# Altium PCB SA01-UARTC-REV-A01.PcbDoc
Units mm, origin at the board's own origin, x right, y up, seen from the top; angles counter-clockwise.
Board outline 70 x 22 mm, 4 copper layers (Top Copper, Signal Layer 1, Signal Layer 2, Bottom Copper), stack 1.57 mm thick; 38 components, 35 nets, 182 pads, 169 vias.
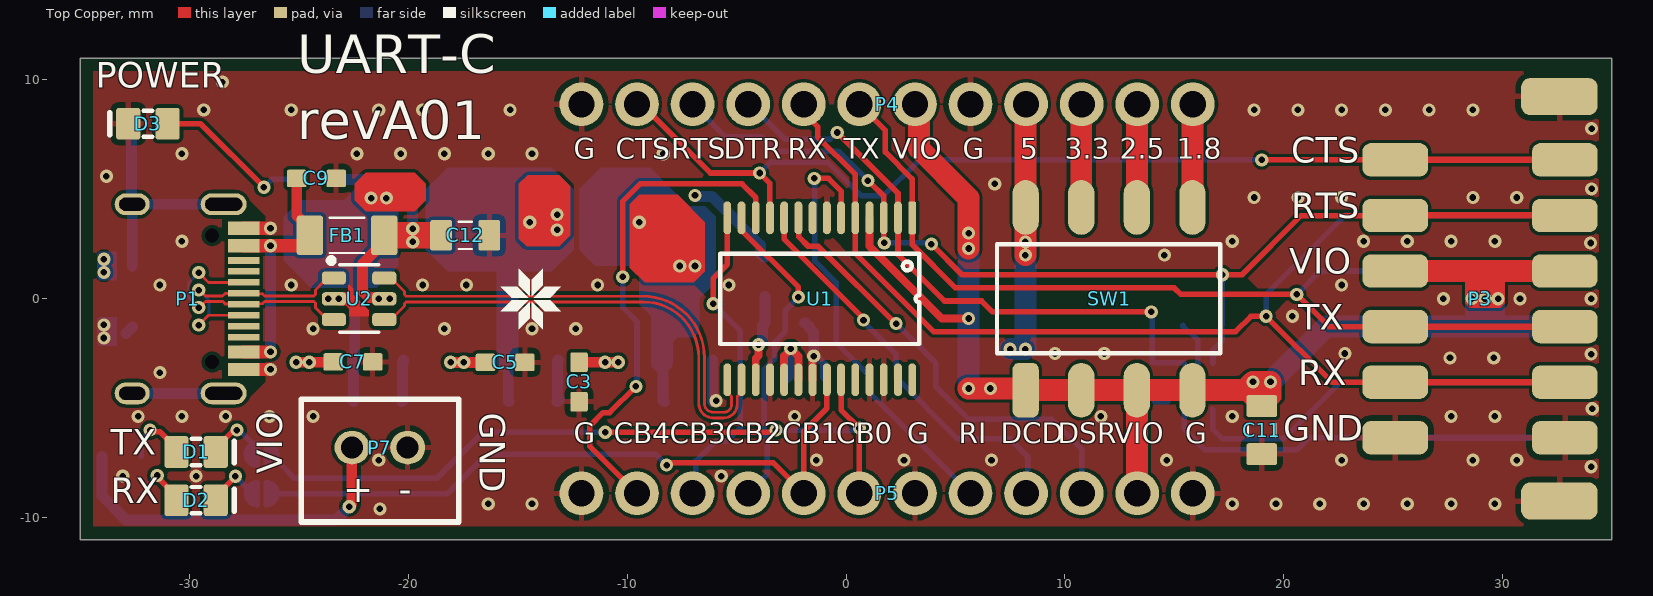
[diagram p0: Top Copper view]
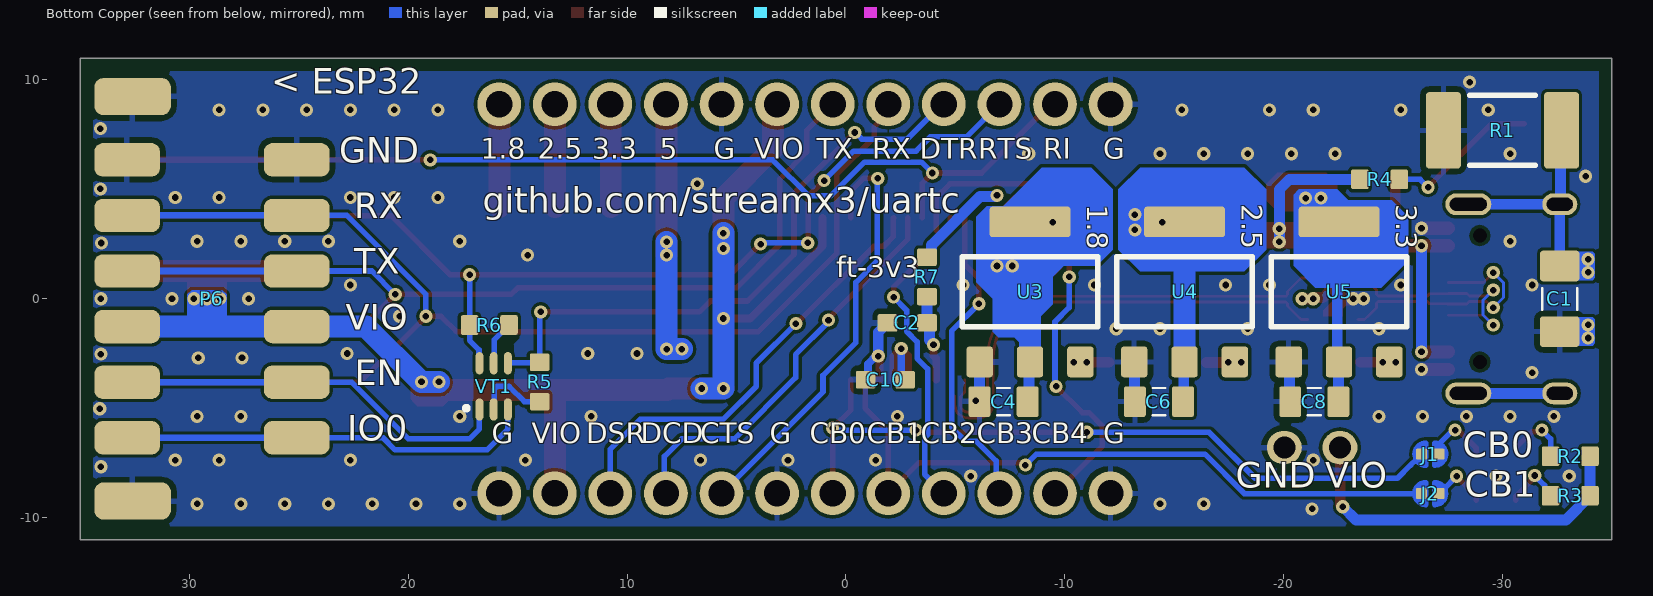
[diagram p1: Bottom Copper view, seen from below]
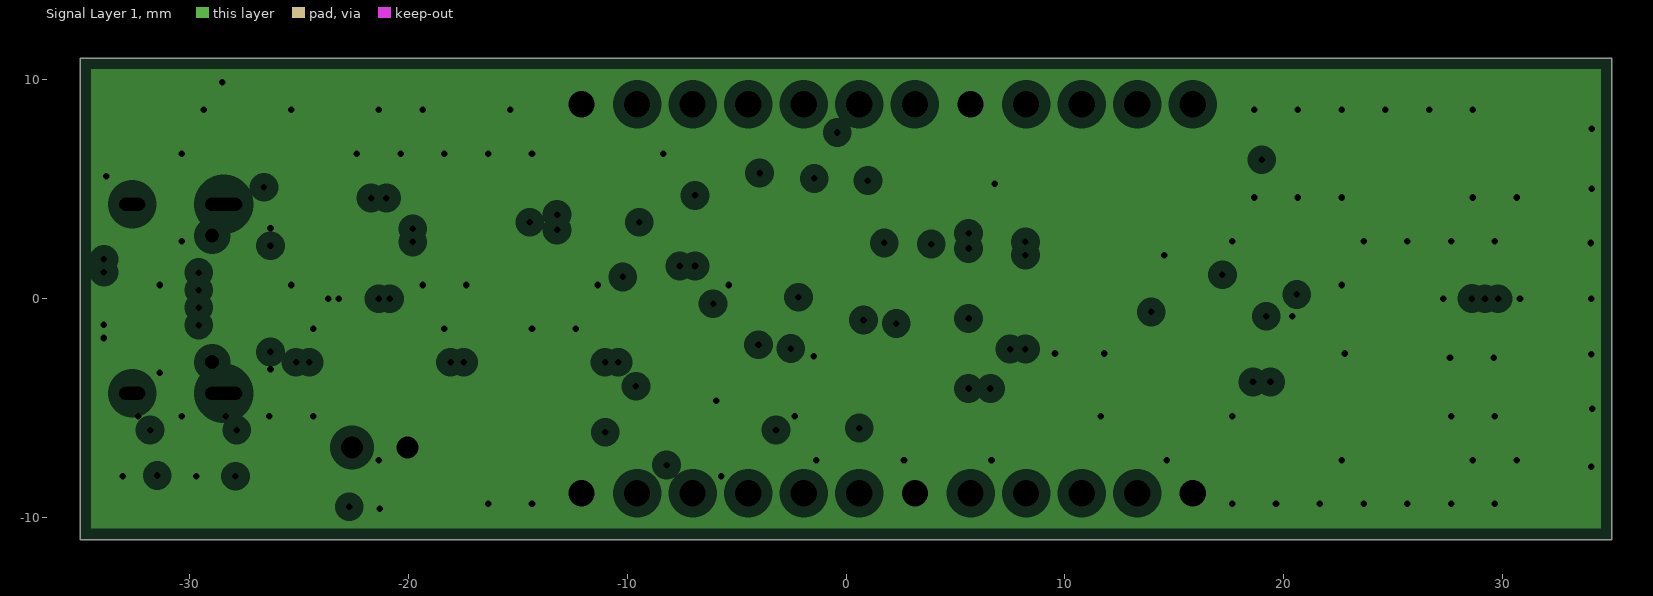
[diagram p2: Signal Layer 1, clearances drawn from the general rule]
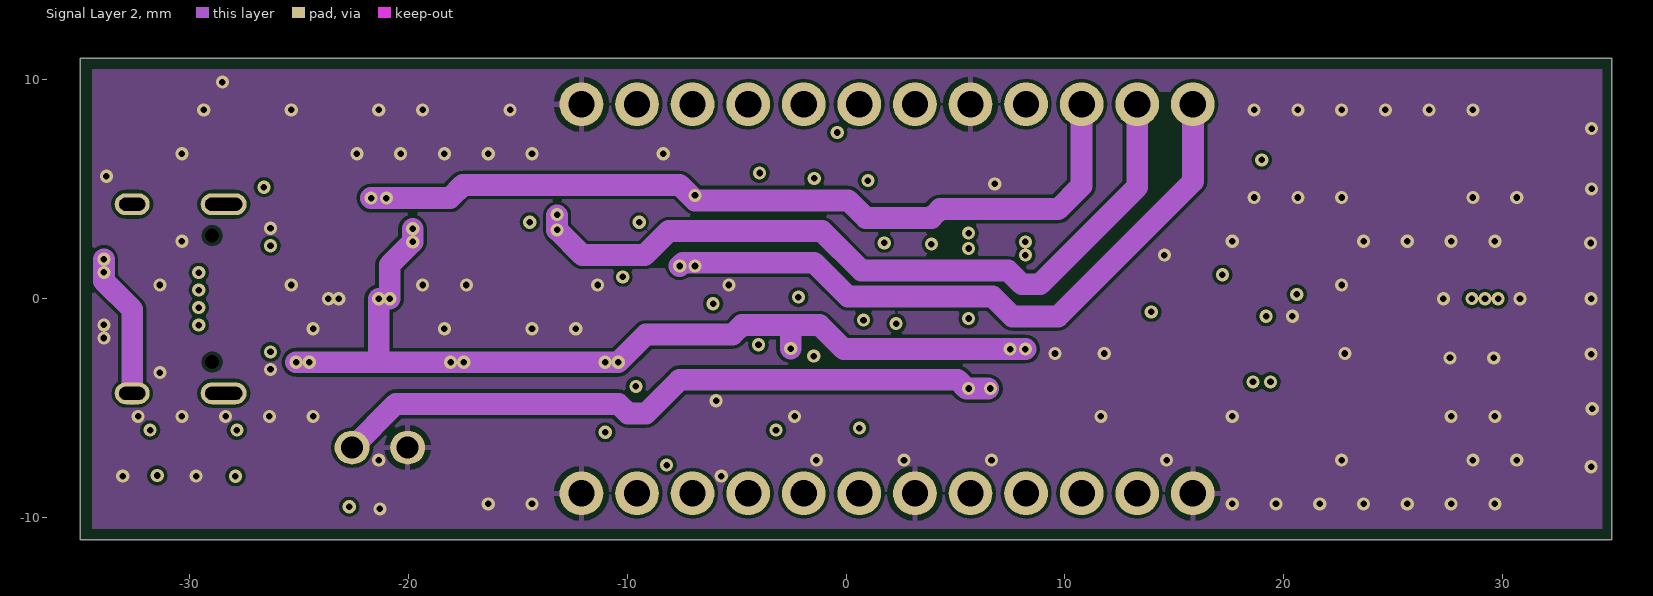
[diagram p3: Signal Layer 2]
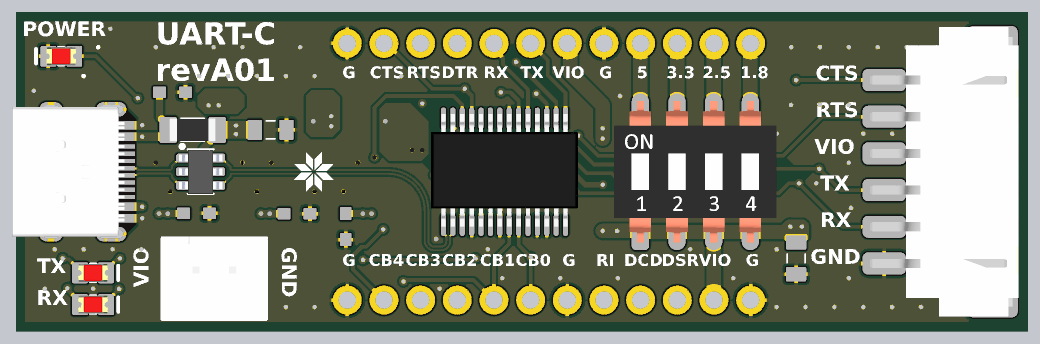
[diagram p4: 3D render of the assembled board from above, using the file's embedded part models]
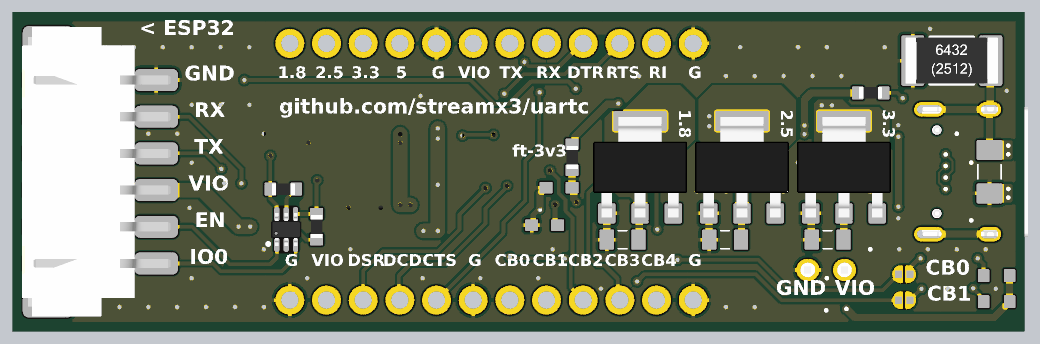
[diagram p5: 3D render of the assembled board from below, using the file's embedded part models]

## Layer stack, top to bottom
Top Mask: solder mask 0.015, Solder Resist, Dk 3.8
Top Copper: signal copper 0.035
Dielectric 1: prepreg 0.1, 2313, Dk 4.05
Signal Layer 1: plane copper 0.0175, net GND
Core: core 1.265, FR-4, Dk 4.5
Signal Layer 2: signal copper 0.0175
Dielectric 2: prepreg 0.1, 2313, Dk 4.05
Bottom Copper: signal copper 0.035
Bottom Mask: solder mask 0.015, Solder Resist, Dk 3.8

## Board outline
-35,-11 35,-11 35,11 -35,11

## Design rules (kind name [scope] priority, off if disabled: settings)
Clearance [All] p1: gap=0.15 ignorepadtopadclearanceinfootprint=FALSE except(0: Arc-Hole Track-Hole SMDPad-Hole THPad-Hole Via-Hole Fill-Hole Poly-Hole Region-Hole Text-Hole; 0.1: Arc-Arc Arc-Track Arc-SMDPad Arc-THPad Arc-Via Arc-Text Track-Track Track-SMDPad Track-THPad Track-Via Track-Text SMDPad-SMDPad SMDPad-THPad SMDPad-Via SMDPad-Text THPad-THPad THPad-Via THPad-Text Via-Via Via-Text Text-Text)
DiffPairsRouting [All] p1: maxlimit=0.254 minlimit=0.1 mostfreqgap=0.254 toplayer_prefgap=0.127 toplayer_minwidth=0.1 toplayer_maxwidth=0.381 toplayer_prefwidth=0.13 midlayer1_mingap=0.254 midlayer1_minwidth=0.381 midlayer1_maxwidth=0.381 midlayer1_prefwidth=0.381 bottomlayer_prefgap=0.127 bottomlayer_minwidth=0.1 bottomlayer_maxwidth=0.381 bottomlayer_prefwidth=0.13 maxuncoupledlength=12.7
PlaneClearance [All] p1: clearance=0.508
PlaneConnect [All] p1: planeconnectstyle=Direct reliefexpansion=0.508 reliefentries=4 reliefconductorwidth=0.254 reliefairgap=0.2
PolygonConnect [All] p1: thpad.connectstyle=Relief thpad.reliefconductorwidth=0.254 thpad.reliefentries=4 thpad.polygonreliefangle="90 Angle" thpad.airgapwidth=0.254 smdpad.connectstyle=Relief smdpad.reliefconductorwidth=0.254 smdpad.reliefentries=4 smdpad.polygonreliefangle="90 Angle" smdpad.airgapwidth=0.254 via.connectstyle=Direct via.reliefconductorwidth=0.254 via.reliefentries=4 via.polygonreliefangle="90 Angle" via.airgapwidth=0.254
RoutingVias [All] p1: holewidth=0.3 width=0.6 viastyle="Through Hole" minholewidth=0.2 minwidth=0.4 maxholewidth=0.711 maxwidth=1.27
SolderMaskExpansion [All] p1: expansion=0.102 istentingtop=FALSE
Width Width_POWER [InNetClass('POWER_NET_CLASS')] p1: maxlimit=5 minlimit=0.1 preferedwidth=0.5 minimp=50.000000 maximp=50.000000 favimp=50.000000
Width [All] p2: maxlimit=5 minlimit=0.1 preferedwidth=0.254 minimp=50.000000 maximp=50.000000 favimp=50.000000
27 further rules are at their usual default settings.

## Classes and differential pairs
differential pair class USB1: USB USBa
net class USB: USB_N USB_P USBa_N USBa_P
net class POWER_NET_CLASS: 1V8 2V5 3V3 3V3FT GND TYPEC_SHIELD VBUS VBUSpre VIO
differential pair USB: +USB_P -USB_N
differential pair USBa: +USBa_P -USBa_N

## Components (designator, comment, footprint, x,y, rotation, side; value= is the part's Value field where it differs from the comment)
C1 "1nF" C1206 -32.613,0 r90 bottom
C2 "100nF" C0603_NOSILK -2.8,-1.1 r180 bottom
C3 "100nF" C0603_NOSILK -12.2,-3.8 r90 top
C4 "10uF" C0805 -7.2,-4.7 r0 bottom
C5 "100nF" C0603_NOSILK -15.575,-2.905 r180 top
C6 "10uF" C0805 -14.3,-4.7 r0 bottom
C7 "100nF" C0603_NOSILK -22.53,-2.886 r180 top
C8 "10uF" C0805 -21.4,-4.7 r0 bottom
C9 "1nF" C0603_NOSILK -24.2,5.5 r0 top
C10 "100nF" C0603_NOSILK -1.8,-3.7 r180 bottom
C11 "4.7uF" C0805 19,-6 r90 top
C12 "4.7uF" C0805 -17.4,2.9 r180 top
D1 "LED" LED_0805 -29.7,-7 r180 top
D2 "LED" LED_0805 -29.7,-9.2 r180 top
D3 "LED" LED_0805 -31.9,8 r0 top
FB1 "FB_BLM31PG500SN1L" FER1206 -22.8,2.9 r0 top
J1 "CFG2_CUT" CFG_J_d1_CUT -26.7,-7.1 r0 bottom
J2 "CFG2_CUT" CFG_J_d1_CUT -26.7,-8.9 r0 bottom
P1 "CON-USB-TYPE-C-B-229" USB-Type-C-B-229 -30.07,0 r270 top
P3 "XHB 2.54-6P SMD" XHB-2.54-6P 29.1,0 r90 top
P4 "HEADER 1x12" "HEADER 1x12 2.54 NO PINS" 1.88,8.89 r90 top
P5 "HEADER 1x12" "HEADER 1x12 2.54 NO PINS" 1.88,-8.89 r90 top
P6 "XHB 2.54-6P SMD" XHB-2.54-6P 29.1,0 r270 bottom
P7 "XH 2.54-2P SMT" XH2.54-2P -21.3,-6.8 r0 top
R1 "=Value" R2512 -30,7.7 r180 bottom
R2 "=Value" R0603_NOSILK -33.1,-7.2 r0 bottom
R3 "=Value" R0603_NOSILK -33.1,-9 r0 bottom
R4 "=Value" R0603_NOSILK -24.384,5.461 r180 bottom
R5 "=Value" R0603_NOSILK 14,-3.8 r270 bottom
R6 "=Value" R0603_NOSILK 16.3,-1.2 r180 bottom
R7 "=Value" R0603_NOSILK -3.7,1 r90 bottom
SW1 "KLS7-KL-04-N-0-0" KLS7-KL-04-N-0-0 12.02,0 r0 top
U1 "FT232RL" SSOP28_0.65_7.8 -1.2,0 r180 top
U2 "USBLC6-2" SOT-23-6L -22.25,0 r270 top
U3 "LD1117S18TR" SOT-223 -8.41,0.314 r180 bottom
U4 "LD1117S25TR" SOT-223 -15.47,0.314 r180 bottom
U5 "LD1117S33TR" SOT-223 -22.53,0.314 r180 bottom
VT1 "BC847BDW1T1G" SOT363/SOT65P210X110-6N 16.1,-4 r90 bottom

## Footprints (in the part's own frame and the unit in brackets; to place one, negate y for a bottom-side part, rotate by r counter-clockwise, add the part's x,y. Pads: shape width x height; smd on the part's side, far side on the other; paste and mask are expansions set on the pad)
C0603_NOSILK [mm]
  rrect20% 0.9x0.8 smd: 1(-0.9,0) 2(0.9,0)
  body extent -0.8,-0.4 0.8,0.39, height 0.85
C0805 [mm]
  rrect20% 1x1.4 smd: 1(-1.1,0) 2(1.1,0)
  silkscreen extent -0.3,-0.63 0.3,0.63, body extent -1,-0.63 1,0.63, height 0.85
C1206 [mm]
  rrect20% 1.4x1.8 smd: 1(-1.5,0) 2(1.5,0)
  silkscreen extent -0.5,-0.8 0.5,0.8, body extent -1.6,-0.8 1.6,0.8, height 1.3
CFG_J_d1_CUT [mm]
  rrect20% 0.5x0.5 smd: 1(-0.4,0) 2(0.4,0)
  Top Copper region: 0.2,0.5 0.4,0.5 0.7,0.2 0.7,-0.2 0.7,-0.2 0.4,-0.5 0.2,-0.5
  Top Copper region: -0.2,-0.5 -0.4,-0.5 -0.7,-0.2 -0.7,0.2 -0.7,0.2 -0.4,0.5 -0.2,0.5
  Top Copper lines w0.254: -0.4,-0.458 ccw(c-0.2,0) -0.2,-0.5 -0.2,0 -0.2,0.5 ccw(c-0.2,0) -0.4,-0.458 ; 0.2,0.5 cw(c0.2,0) 0.639,0.239 cw(c0.2,0) 0.2,-0.5 0.2,0 0.2,0.5
FER1206 [mm]
  rrect20% 1.2x1.8 smd: 1(-1.7,0) 2(1.7,0)
  silkscreen extent -0.8,-0.8 0.8,0.8, body extent -1.6,-0.8 1.6,0.8, height 1.1
"HEADER 1x12 2.54 NO PINS" [mm]
  round 2 hole 1.2: 1(0,13.97) 2(0,11.43) 3(0,8.89) 4(0,6.35) 5(0,3.81) 6(0,1.27) 7(0,-1.27) 8(0,-3.81) 9(0,-6.35) 10(0,-8.89) 11(0,-11.43) 12(0,-13.97)
KLS7-KL-04-N-0-0 [mm]
  rrect50% 1.2x2.5 smd: 1(-3.81,-4.175)
  oval 1.2x2.5 smd: 2(-1.27,-4.175) 3(1.27,-4.175) 4(3.81,-4.175) 5(3.81,4.175) 6(1.27,4.175) 7(-1.27,4.175) 8(-3.81,4.175)
  silkscreen extent -5.12,-2.49 5.08,2.49, body extent -5.63,-4.9 5.63,4.9, height 4
LED_0805 [mm]
  rrect20% 1.1x1.45 smd: A(0.9,0) C(-0.9,0)
  silkscreen extent -1.75,-0.6 0.2,0.6, body extent -1.01,-0.63 1.01,0.62, height 1.1
R0603_NOSILK [mm]
  rrect20% 0.8x0.9 smd: 1(-0.9,0) 2(0.9,0)
  body extent -0.8,-0.4 0.8,0.4
R2512 [mm]
  rrect20% 1.6x3.5 smd: 1(-2.7,0) 2(2.7,0)
  silkscreen extent -1.5,-1.6 1.5,1.6, body extent -3.2,-1.6 3.2,1.6, height 0.6
SOT363/SOT65P210X110-6N [mm]
  rrect100% 1.02x0.36 smd: 1(-1.055,0.65) 2(-1.055,0) 3(-1.055,-0.65) 4(1.055,-0.65) 5(1.055,0) 6(1.055,0.65)
  silkscreen extent -1.1,1.15 -0.9,1.35, body extent -1.15,-1.05 1.15,1.05, height 1
SOT-23-6L [mm]
  rrect50% 0.6x1.1 smd mask+0.095: 1(-0.95,-1.15) 2(0,-1.15) 3(0.95,-1.15) 4(0.95,1.15) 5(0,1.15) 6(-0.95,1.15)
  silkscreen extent -1.85,-1.37 1.53,0.89, body extent -1.52,-1.5 1.53,1.5, height 1.4
SOT-223 [mm]
  rrect20% 1.2x1.4 smd: 1(-2.3,-3.2) 2(0,-3.2) 3(2.3,-3.2)
  rrect20% 3.7x1.4 smd: TAB(0,3.2)
  silkscreen extent -3.1,-1.6 3.1,1.6, body extent -3.25,-3.48 3.25,3.48, height 1.7
SSOP28_0.65_7.8 [mm]
  rrect50% 0.36x1.5 smd: 1(-4.225,-3.7)
  oval 0.36x1.5 smd: 2(-3.575,-3.7) 3(-2.925,-3.7) 4(-2.275,-3.7) 5(-1.625,-3.7) 6(-0.975,-3.7) 7(-0.325,-3.7) 8(0.325,-3.7) 9(0.975,-3.7) 10(1.625,-3.7) 11(2.275,-3.7) 12(2.925,-3.7) 13(3.575,-3.7) 14(4.225,-3.7) 15(4.225,3.7) 16(3.575,3.7) 17(2.925,3.7) 18(2.275,3.7) 19(1.625,3.7) 20(0.975,3.7) 21(0.325,3.7) 22(-0.325,3.7) 23(-0.975,3.7) 24(-1.625,3.7) 25(-2.275,3.7) 26(-2.925,3.7) 27(-3.575,3.7) 28(-4.225,3.7)
  silkscreen extent -4.55,-2.06 4.55,2.06, body extent -5.1,-4 5.1,3.8, height 1.85
USB-Type-C-B-229 [mm]
  rect 0.6x1.45 smd: A1-B12(-3.225,2.548) A4-B9(-2.425,2.548) A9-B4(2.425,2.548) A12-B1(3.225,2.548)
  rect 0.3x1.45 smd: A5(-1.25,2.548) A6(-0.25,2.548) A7(0.25,2.548) A8(1.25,2.548) B5(1.75,2.548) B6(0.75,2.548) B7(-0.75,2.548) B8(-1.75,2.548)
  round 0.2 hole 0.65 unplated paste+0 mask+0.3: MECH(-2.89,1.102) MECH(2.89,1.102)
  oval 1x2.1 hole 0.6 slot 1.7 at 90 deg: SHIELD(-4.32,1.632) SHIELD(4.32,1.632)
  oval 1x1.6 hole 0.6 slot 1.2 at 90 deg: SHIELD(-4.32,-2.548) SHIELD(4.32,-2.548)
  body extent -4.48,-5.2 4.48,2.55, height 3.26
XH2.54-2P [mm]
  oval 1.6x1.524 hole 1: 1(-1.27,0) 2(1.27,0)
  silkscreen extent -3.6,-3.4 3.6,2.2, body extent -3.7,-3.5 3.7,2.3, height 7.1
XHB-2.54-6P [mm]
  rrect50% 1.524x3 smd: 1(-6.35,-3.75) 1(-6.35,4) 2(-3.81,-3.75) 2(-3.81,4) 3(-1.27,4) 3(-1.27,-3.75) 4(1.27,4) 4(1.27,-3.75) 5(3.81,-3.75) 5(3.81,4) 6(6.35,-3.75) 6(6.35,4)
  rrect50% 1.7x3.5 smd: S1(-9.24,-3.5) S2(9.24,-3.5)
  body extent -10.02,-5.3 10.02,5, height 6

## Part data
C1: library part C1206_1nF_2KV, "Ceramic capacitor", Voltage=2KV, Capacity=1nF, PriceRCSUAH=1,7, RCS=https://www.rcscomponents.kiev.ua/product/1nf-2000v-x7r-10-1206-3k-reel-1206b102k202n3-hitano-kondensatory-keramicheskie-smd_11455.html, Size=1206
C2 C3 C5 C7 C10: library part C0603_100nF_16V, "Ceramic capacitor", LCSC=C108079, Voltage=16V, Capacity=100nF, ComponentLink1Description=URLLCSC, ComponentLink1URL=https://lcsc.com/product-detail/Multilayer-Ceramic-Capacitors-MLCC-SMD-SMT_YAGEO-CC0603KRX7R7BB104_C108079.html, Kosmodrom=http://www.kosmodrom.com.ua/el.php?name=CP06030.125V8020, MF=YAGEO, MP=CC0603KRX7R7BB104, PriceKosmodromUAH=1, PriceLCSC=0.0049, Size=0603
C4 C6 C8: library part C0805_10uF_10V, "Ceramic capacitor", Voltage=10V, Capacity=10uF, Size=0805
C9: library part C0603_1nF_25V, "Ceramic capacitor", Voltage=25V, Capacity=1nF, Kosmodrom=http://www.kosmodrom.com.ua/el.php?name=CP0603100050V10, PriceKosmodromUAH=0,75, Size=0603
C11 C12: library part C0805_4.7uF_10V, "Ceramic capacitor", Voltage=10V, Capacity=4.7uF, LCSC=https://lcsc.com/product-detail/Multilayer-Ceramic-Capacitors-MLCC-SMD-SMT_Samsung-Electro-Mechanics-CL21B475KPFNNNE_C87998.html, Size=0805
D1 D2 D3: "Led General", Package="0805 Dialight", Availability=Unavailable, MF=Dialight, MP=598-8140-107F, Owned=3000, Price=None, SnapEDA_Link=https://www.snapeda.com/parts/598-8140-107F/Dialight/view-part/?ref=snap
P1: "Type C 3A Throughthole Shell, USB2 + PD SMD pins", Kosmodrom=http://www.kosmodrom.com.ua/el.php?name=USB-Type-C-B-229, PriceKosmodromUAH=8,25
P3 P6: "JST XHB 2.54 pin header SMD Horizontal", ComponentLink1Description=URLLCSC
P7: "JST XH 2.54 pin header SMT Vertical", ComponentLink1Description=URLLCSC
R1: library part R2512_1M_5%, "Resistor General", Resistance=1M, Tolerance=5%, PriceRCSUAH=0,75, RCS=https://www.rcscomponents.kiev.ua/product/1-mohm-5-1w-2512-rc2512jk-1mr-hitano-rezistor-smd_51251.html, Size=2512
R2 R3 R4: library part R0603_470R, "Resistor General", Resistance=470R, Tolerance=5%, Owned=3000, Size=0603
R5 R6: library part R0603_12K, "Resistor General", Resistance=12K, Tolerance=5%, Owned=3000, PriceRCSUAH=0,06, RCS=https://www.rcscomponents.kiev.ua/product/12-kohm-5-0-1w-50v-0603-rc0603jr-12k0-hitano-rezistor-smd_1014.html, Size=0603
R7: library part R0603_0R, "Resistor General", Resistance=0, PriceRCSUAH=0,06, RCS=https://www.rcscomponents.kiev.ua/product/0-ohm-5-0-1w-50v-0603-rc0603jr-0r-hitano-rezistor-smd_4159.html, Size=0603
U2: "Very low capacitance ESD protection", Kosmodrom=http://www.kosmodrom.com.ua/el.php?name=USBLC6-2P6, PriceKosmodromUAH=4,25
U3 U4 U5: "Low drop fixed and adjustable positive voltage regulators"
VT1: "Dual General Purpose Transistors NPN SOT 363", Kosmodrom=http://www.kosmodrom.com.ua/el.php?name=BC847BDW1T1G, PriceKosmodromUAH=1,5
FB1: ComponentLink1Description=URLKosmodrom, ComponentLink1URL=http://www.kosmodrom.com.ua/el.php?name=BLM31PG500SN1L, Imax=3A, Impedance="50 Ohm", PriceKosmodrom=8, RDC="25 mOhm"
SW1: ComponentLink1Description=URLRCS, ComponentLink1URL=https://www.rcscomponents.kiev.ua/product/pereklyuchatel-swd4-4-kls7-kl-04-n-0-0_89374.html

## Via types
v1: diameter 0.6/0.6/0.6 (per signal layer), hole 0.3, Top Copper to Bottom Copper, tented both sides, 88 vias
v2: diameter 0.6, hole 0.3, Top Copper to Bottom Copper, tented both sides, 81 vias

## Nets (pads, with @x,y where several pads share a name; then routed paths per layer and width w, separated by ;. In a path a pad name is that pad's centre, name@x,y a point inside that pad or via, vN(x,y) a via of type N, cw(c..) or ccw(c..) an arc to the next point about the centre after c; other vN are vias at no path point)
1V8: C4.1 P4.12 SW1.5 U3.2 U3.TAB | length 42.6
  Top Copper w0.5: SW1.5@15.81,4.175 SW1.5@15.83,4.195 ; P4.12@15.83,8.87 P4.12
  Top Copper w1: SW1.5@15.83,4.195 P4.12@15.83,8.87
  Signal Layer 2 w1: v2(-7.6,1.5) -7.45,1.65 -1.45,1.65 0.1,0.1 6.7,0.1 7.6,-0.8 9.7,-0.8 15.85,5.35 P4.12
  Bottom Copper w0.5: U3.2 -8.355,-2.941 -8.355,-4.645 C4.1 ; U3.TAB U3.TAB@-7.96,3.964
  Bottom Copper w1: U3.2 -8.41,0.69 v2(-7.6,1.5)
  other v2: -6.9,1.5 -9.45,3.5
2V5: C6.1 P4.11 SW1.6 U4.2 U4.TAB | length 47.7
  Top Copper w0.5: SW1.6@13.27,4.175 SW1.6@13.29,4.195 ; P4.11@13.29,8.87 P4.11
  Top Copper w1: SW1.6@13.29,4.195 P4.11@13.29,8.87
  Signal Layer 2 w1: v2@-13.2,3.8 v2(-13.2,3.15) -12.05,2 -9.2,2 -8.1,3.1 -1.1,3.1 0.7,1.3 7.4,1.3 8.036,0.664 8.864,0.664 13.31,5.11 P4.11
  Bottom Copper w0.5: U4.2 -15.435,-2.921 -15.435,-4.665 C6.1
  Bottom Copper w1: U4.2 U4.TAB
  other v2: -14.45,3.5 -13.2,3.85
3V3: C8.1 P4.10 R7.2 SW1.7 U5.2 U5.TAB | length 55.5
  Top Copper w0.5: SW1.7@10.73,4.175 SW1.7@10.75,4.195 ; P4.10@10.75,8.87 P4.10
  Top Copper w1: SW1.7@10.75,4.195 P4.10@10.75,8.87
  Signal Layer 2 w1: v2(-21.7,4.6) v2(-21,4.6) -18.1,4.6 -17.5,5.2 -7.6,5.2 -6.9,4.5 0.1,4.5 0.9,3.7 3.9,3.7 4.3,4.1 9.7,4.1 10.762,5.162 10.762,8.882 P4.10
  Bottom Copper w0.5: U5.TAB -22.45,3.434 -22.45,-2.806 U5.2 -22.515,-2.901 -22.515,-4.685 C8.1 ; v2(-6.9,4.725) -6.856,4.681 -6.131,4.681 -3.9,2.45 -3.9,2.05 -3.75,1.9 R7.2 ; P4.10@10.77,8.67 P4.10
3V3FT: C2.2 R7.1 U1.17 | length 4
  Top Copper w0.36: U1.17 -4.125,-2.725 -4,-2.6 v2(-4,-2.1)
  Bottom Copper w0.5: v2(-4,-2.1) -4,-2.073 -3.817,-1.89 -3.817,-1.217 C2.2 -3.7,-0.2 R7.1
CBUS0: J1.2 P5.6 U1.23 | length 33.9
  Top Copper w0.254: v2(-11,-6.1) -3.3,-6.1 v2(-3.2,-6) ; U1.23 -0.225,-5.075 v2(0.61,-5.91) P5.6
  Bottom Copper w0.254: J1.2 -26.061,-7.339 -25.8,-7.6 -25.2,-8.2 -18.7,-8.2 -16.6,-6.1 v2(-11,-6.1) ; v2(-3.2,-6) 0.52,-6 v2(0.61,-5.91)
CBUS1: J2.2 P5.5 U1.22 | length 31.6
  Top Copper w0.254: v2(-8.2,-7.6) -8.106,-7.6 -8.006,-7.5 -3.32,-7.5 P5.5 -1.93,-6.055 -0.875,-5 U1.22
  Bottom Copper w0.254: J2.2 -26,-8.9 -18.2,-8.9 -16.4,-7.1 -8.7,-7.1 v2(-8.2,-7.6)
CBUS2: P5.4 U1.13 | length 14.7
  Top Copper w0.254: U1.13 -4.775,3.13 -2.175,0.53 v2(-2.175,0.075)
  Bottom Copper w0.254: P5.4 -3.6,-8.02 -3.6,-6.345 -3.727,-6.218 -3.727,-3.202 -3.25,-2.725 -3.25,-1.966 -2.775,-1.491 -2.775,-0.525 v2(-2.175,0.075)
CBUS3: P5.3 U1.14 | length 14.6
  Top Copper w0.254: v2(-6.075,-0.225) -6.075,0.925 -5.425,1.575 U1.14
  Bottom Copper w0.254: P5.3 -6.858,-8.738 -6.858,-7.408 -5.95,-6.5 -5.45,-6.5 -4.825,-5.875 -4.825,-1.475 v2(-6.075,-0.225)
CBUS4: P5.2 U1.12 | length 23.7
  Top Copper w0.254: v2(-10.2,1) -10.2,4.462 -9.41,5.252 -4.752,5.252 -4.125,4.625 U1.12@-4.125,3.13 ; v2(-9.6,-4) -10.8,-5.2 -11.1,-5.2 -11.7,-5.8 -11.7,-6.74 P5.2
  Bottom Copper w0.254: v2(-10.2,1) -10.2,-0.4 -9.55,-1.05 -9.55,-3.95 v2(-9.6,-4)
CTS: P3.6 P4.2 U1.11 | length 47.5
  Top Copper w0.254: P4.2 -9.34,8.89 -6.2,5.75 v2(-3.95,5.75) -3.475,5.275 U1.11 ; v2(19,6.35) P3.6@25.1,6.35
  Top Copper w0.3: P3.6@25.1,6.35 P3.6@32.85,6.35
  Bottom Copper w0.254: v2(-3.95,5.75) -3.45,6.25 -0.85,6.25 0.7,4.7 1.7,4.7 3.35,6.35 v2(19,6.35)
DCD: P5.9 U1.10 | length 18.6
  Top Copper w0.254: U1.10@-2.824,3.699 -2.824,2.724 0.8,-0.9 v2(0.8,-0.975)
  Bottom Copper w0.254: v2(0.8,-0.975) 0.8,-1.05 2.3,-2.55 2.3,-3.6 5.1,-6.4 7.5,-6.4 8.3,-7.2 8.3,-8.82 P5.9
DSR: P5.10 U1.9 | length 21
  Top Copper w0.254: U1.9 -2.155,3.68 -2.155,2.83 -1.725,2.4 -1.275,2.4 v2@2.4,-1.275 ; v2@2.28,-1.155 v2@2.4,-1.275 ; v2(2.293,-1.133) 2.293,-1.143 2.425,-1.275 v2@2.4,-1.275
  Bottom Copper w0.254: v2(2.293,-1.133) 4.1,-2.94 4.1,-4 5.6,-5.5 9.4,-5.5 10.77,-6.87 P5.10
DTR: P4.4 R5.1 U1.2 VT1.4 | length 28
  Top Copper w0.254: v2(-0.4,7.6) 2.375,4.825 U1.2 2.375,2.025 4.5,-0.1 6.2,-0.1 6.7,-0.6 v2(13.95,-0.6)
  Bottom Copper w0.254: P4.4 -4.39,8.89 -2.8,7.3 -0.722,7.3 -0.422,7.6 v2(-0.4,7.6) ; v2(13.95,-0.6) 14,-0.65 R5.1 ; R5.1@14.05,-2.9 14.1,-2.9 14.122,-2.922 15.427,-2.922 VT1.4
DTRt2: R5.2 VT1.2 | length 3.2
  Bottom Copper w0.254: R5.2@14.1,-4.7 14.7,-4.7 15.4,-4 15.931,-4 16.08,-4.149 16.08,-5.035 VT1.2
EN: P6.5 VT1.1 | length 18.3
  Bottom Copper w0.254: VT1.1 16.75,-5.95 17.2,-6.4 20,-6.4 21.6,-4.8 22.59,-3.81 P6.5@25.1,-3.81
  Bottom Copper w0.3: P6.5@25.1,-3.81 25.3,-3.81 P6.5@32.85,-3.81
GND: C1.1 C2.1 C3.1 C4.2 C5.1 C6.2 C7.1 C8.2 C9.2 C10.1 C11.1 C12.1 D3.C P1.A1-B12 P1.A12-B1 P3.1 P3.S1 P3.S2 P4.1 P4.8 P5.1 P5.7 P5.12 P6.1 P6.S1 P6.S2 P7.2 R1.1 U1.7 U1.18 U1.21 U1.25 U1.26 U2.2 U3.1 U4.1 U5.1 | length 12.9
  Top Copper w0.254: P4.1@-12.09,8.79 P4.1
  Top Copper w0.36: U1.21 -1.525,-2.668 v2(-1.473,-2.616)
  Top Copper w0.6: P1.A12-B1 v2(-26.3,-3.225) ; P1.A1-B12 v2(-26.3,3.225)
  Bottom Copper w0.36: v2@-1.369,-2.612 -1.011,-2.971 C10.1@-1.011,-3.589
  Bottom Copper w0.5: C1.1@-32.894,-1.578 C1.1@-32.613,-1.297 ; C8.2 C8.2@-20.265,-4.665 ; U5.1@-20.23,-2.786 U5.1 -20.265,-2.921 C8.2@-20.265,-4.665 ; C8.2@-20.2,-4.6 C8.2@-20.265,-4.665 ; C6.2 C6.2@-13.185,-4.685 ; U4.1@-13.17,-2.786 U4.1 -13.185,-2.901 C6.2@-13.185,-4.685 ; C6.2@-13.1,-4.6 C6.2@-13.185,-4.685 ; U3.1@-6.11,-2.786 U3.1 -6.105,-2.891 -6.105,-4.695 C4.2 ; C2.1 -1.85,-1.1 -1.7,-1.25 -1.7,-1.3 -1.473,-1.527 v2(-1.473,-2.616)
  other v1: -21.3,-9.6 -16.35,-9.37 -14.35,-9.37 17.65,-9.37 19.65,-9.37 21.65,-9.37 23.65,-9.37 25.65,-9.37 27.65,-9.37 29.65,-9.37 -5.7,-8.1 34.05,-7.675 -21.35,-7.37 -1.35,-7.37 2.65,-7.37 6.65,-7.37 14.65,-7.37 22.65,-7.37 28.65,-7.37 30.65,-7.37 -32.35,-5.37 -30.35,-5.37 -28.35,-5.37 -26.35,-5.37 -24.35,-5.37 -2.35,-5.37 11.65,-5.37 17.65,-5.37 27.65,-5.37 29.65,-5.37 34.1,-5.025 -5.937,-4.657 -31.35,-3.37 27.6,-2.7 29.6,-2.7 34.05,-2.525 9.55,-2.5 11.8,-2.5 22.8,-2.5 -24.35,-1.37 -18.35,-1.37 -14.35,-1.37 -12.35,-1.37 20.4,-0.8 27.3,0 30.8,0 34.05,0 -31.35,0.63 -25.35,0.63 -19.35,0.63 -17.35,0.63 -11.35,0.63 -5.35,0.63 22.65,0.63 14.55,2 34.025,2.55 -30.35,2.63 17.65,2.63 23.65,2.63 25.65,2.63 27.65,2.63 29.65,2.63 18.65,4.63 20.65,4.63 22.65,4.63 28.65,4.63 30.65,4.63 34.075,5.025 6.8,5.25 -30.35,6.63 -22.35,6.63 -20.35,6.63 -18.35,6.63 -16.35,6.63 -14.35,6.63 -8.35,6.63 34.075,7.775 -29.35,8.63 -25.35,8.63 -21.35,8.63 -19.35,8.63 -15.35,8.63 18.65,8.63 20.65,8.63 22.65,8.63 24.65,8.63 26.65,8.63 28.65,8.63
  other v2: -33.05,-8.1 -29.7,-8.1 -33.914,-1.791 -33.914,-1.191 -23.65,0 -23.18,0 -33.8,5.6 -28.5,9.9
IO0: P6.6 VT1.3 | length 18.9
  Bottom Copper w0.254: VT1.3 15.45,-5.95 16.4,-6.9 20.6,-6.9 21.15,-6.35 P6.6@25.1,-6.35
  Bottom Copper w0.3: P6.6@25.1,-6.35 P6.6@32.85,-6.35
PRWLED: D3.A R4.2 | length 7.1
  Top Copper w0.254: D3.A -29.5,8 v2(-26.6,5.1)
  Bottom Copper w0.254: v2(-26.6,5.1) -26.239,5.461 R4.2
RI: P5.8 U1.6 | length 20
  Top Copper w0.254: v2(-1.45,5.5) -0.8,5.5 -0.225,4.925 U1.6
  Bottom Copper w0.254: v2(-1.45,5.5) -1.425,5.475 -1.425,1.725 -0.45,0.75 -0.45,-2 1.05,-3.5 1.05,-4.25 P5.8
RTS: P3.5 P4.3 R6.1 U1.3 VT1.6 | length 49.4
  Top Copper w0.254: v2@1,5.3 1.129,5.3 1.725,4.704 U1.3 1.725,2.575 v2(1.747,2.553) ; v2(3.9,2.5) 5.3,1.1 18.1,1.1 20.8,3.8 25.09,3.8 P3.5@25.1,3.81
  Top Copper w0.3: P3.5@25.1,3.81 P3.5@32.85,3.81
  Bottom Copper w0.254: P4.3 -6.99,8.89 -5.5,7.4 -3.85,7.4 -3.2,6.75 -0.35,6.75 v2(1,5.4) ; v2(1.747,2.553) 3.847,2.553 v2(3.9,2.5) ; VT1.6 16.77,-2.925 16.77,-2.33 17.2,-1.9 R6.1@17.2,-1.4 ; R6.1 v2(17.2,1.1)
RTSt2: R6.2 VT1.5 | length 2.1
  Bottom Copper w0.254: R6.2 15.4,-1.25 15.673,-1.523 15.723,-1.523 16.08,-1.88 16.08,-2.925 VT1.5
RX: P3.2 P4.5 P6.2 U1.5 | length 59.4
  Top Copper w0.254: P4.5 -1.93,8.498 -1.3,7.868 -1.3,7.4 0.425,5.675 U1.5 0.425,2.075 4,-1.5 17.8,-1.5 18.5,-0.8 v2(19.2,-0.8) 22.21,-3.81 P3.2@25.1,-3.81
  Top Copper w0.3: P3.2@25.1,-3.81 P3.2@32.85,-3.81
  Bottom Copper w0.254: v2(19.2,-0.8) 19.2,0.2 22.81,3.81 P6.2@25.1,3.81
  Bottom Copper w0.3: P6.2@25.1,3.81 P6.2@32.85,3.81
RXLED: D2.C J2.1 | length 2.6
  Top Copper w0.254: D2.C -28.8,-9.025 -27.9,-8.125 v2(-27.9,-8.109)
  Bottom Copper w0.254: v2(-27.9,-8.109) -27.348,-8.661 -27.339,-8.661 J2.1
RXLEDa: D2.A R3.2 | length 2.7
  Top Copper w0.254: v2(-31.475,-8.075) -31.475,-8.15 -30.6,-9.025 D2.A
  Bottom Copper w0.254: R3.2 -31.927,-8.727 -31.927,-8.527 v2(-31.475,-8.075)
TX: P3.3 P4.6 P6.3 U1.1 | length 51.5
  Top Copper w0.254: P4.6 1.8,7.7 1.8,6.7 3.025,5.475 U1.1 3.031,3.694 3.031,2.469 5,0.5 15,0.5 15.3,0.2 v2(20.6,0.2) 22.07,-1.27 P3.3@25.1,-1.27
  Top Copper w0.3: P3.3@25.1,-1.27 P3.3@32.85,-1.27
  Bottom Copper w0.254: v2(20.6,0.2) 21.67,1.27 P6.3@25.1,1.27
  Bottom Copper w0.3: P6.3@25.1,1.27 P6.3@32.85,1.27
TXLED: D1.C J1.1 | length 2.9
  Top Copper w0.254: D1.C -28.8,-6.825 -27.975,-6 v2(-27.838,-6)
  Bottom Copper w0.254: v2(-27.838,-6) -27.742,-6 -27.1,-6.642 J1.1
TXLEDa: D1.A R2.2 | length 3.1
  Top Copper w0.254: v2(-31.8,-6) -31.734,-6.066 -31.359,-6.066 -30.6,-6.825 D1.A
  Bottom Copper w0.254: R2.2 -32.2,-6.4 v2(-31.8,-6)
TYPEC_SHIELD: C1.2 P1.SHIELD R1.2 | length 21.3
  Signal Layer 2 w1: v2(-33.914,1.809) -33.914,0.814 -32.618,-0.483 P1.SHIELD@-32.618,-4.32
  Bottom Copper w0.5: R1.2 -32.659,7.659 -32.659,4.361 P1.SHIELD@-32.618,4.32 ; P1.SHIELD@-32.618,-4.32 P1.SHIELD@-28.438,-4.32 ; C1.2@-32.618,1.5 P1.SHIELD@-32.618,4.32 ; P1.SHIELD@-28.438,4.32 P1.SHIELD@-32.618,4.32
  other v2: -33.914,1.209
USB_N: P1.A7 P1.B7 U2.3 | length 11.1
  Top Copper w0.13: v2(-29.575,-0.4) -29.535,-0.4 -29.264,-0.129 -28.476,-0.129 -28.366,-0.238 -27.535,-0.238 P1.A7 -27.5,-0.228 -26.679,-0.228 -26.579,-0.129 -25.053,-0.129 -24.317,-0.128 -24.241,-0.205 -24.241,-0.409 -23.935,-0.715 -23.931,-0.715 -23.696,-0.95 U2.3 ; v2(-29.575,1.2) -29.125,0.75 P1.B7
  Bottom Copper w0.13: v2(-29.575,-0.4) -30.04,0.065 -30.04,0.735 v2(-29.575,1.2)
USB_P: P1.A6 P1.B6 U2.1 | length 11.1
  Top Copper w0.13: v2(-29.575,-1.2) -29.125,-0.75 P1.B6 ; v2(-29.575,0.4) -29.535,0.4 -29.264,0.128 -28.491,0.128 -28.37,0.25 P1.A6 -27.5,0.228 -26.679,0.228 -26.579,0.128 -25.16,0.128 -24.317,0.129 -24.241,0.205 -24.241,0.409 -23.935,0.715 -23.931,0.715 -23.696,0.95 U2.1
  Bottom Copper w0.13: v2(-29.575,-1.2) -29.11,-0.735 -29.11,-0.065 v2(-29.575,0.4)
USBa_N: U1.16 U2.4 | length 22
  Top Copper w0.13: U2.4 -20.804,-0.95 -20.569,-0.715 -20.565,-0.715 -20.183,-0.333 -20.183,-0.216 -20.107,-0.14 -9.269,-0.14 cw(c-9.269,-2.68) -6.729,-2.68 -6.729,-4.781 ccw(c-6.069,-4.781) -6.069,-5.441 -5.591,-5.441 ccw(c-5.591,-4.822) -4.972,-4.822 -4.972,-4.461 -4.775,-4.265 U1.16
USBa_P: U1.15 U2.6 | length 21.6
  Top Copper w0.13: U2.6 -20.804,0.95 -20.569,0.715 -20.565,0.715 -20.183,0.333 -20.183,0.193 -20.107,0.117 -9.269,0.117 cw(c-9.269,-2.68) -6.472,-2.68 -6.472,-4.781 ccw(c-6.069,-4.781) -6.069,-5.184 -5.591,-5.184 ccw(c-5.591,-4.822) -5.229,-4.822 -5.229,-4.461 -5.425,-4.265 U1.15
VBUS: C3.2 C5.2 C7.2 C10.2 C12.2 FB1.2 P4.9 R4.1 SW1.8 U1.19 U1.20 U2.5 U3.3 U4.3 U5.3 | length 79.4
  Top Copper w0.36: U1.19 -2.825,-2.602 v2@-2.525,-2.302 ; v2(-2.525,-2.275) -2.175,-2.625 U1.20@-2.175,-3.691
  Top Copper w0.5: v2(-25.13,-2.9) -24.1,-2.9 ; v2(-24.53,-2.9) C7.2@-23.5,-2.9 ; U2.5 v2(-21.35,0) -21.4,0.05 -21.807,0.05 -22.1,0.343 -22.1,1.6 -21.45,2.25 -21.1,2.6 FB1.2 ; v2@-18.075,-2.905 C5.2 ; C3.2@-12.01,-2.9 v2(-11.01,-2.9) ; -11.44,-2.9 v2(-10.41,-2.9) ; v2@-2.525,-2.302 v2(-2.525,-2.275) ; P4.9@8.21,8.87 P4.9
  Top Copper w1: v2(8.2,2) SW1.8@8.2,4.175 ; SW1.8@8.21,4.195 P4.9@8.21,8.87
  Top Copper w1.2: FB1.2@-20.9,2.9 -19.8,2.9 C12.2@-18.7,2.9
  Signal Layer 2 w0.5: -2.525,-1.225 -2.5,-1.2
  Signal Layer 2 w1: v2(-25.13,-2.9) v2@-24.43,-2.9 ; v2(-24.53,-2.9) -21.35,-2.9 ; v2(-19.8,3.2) v2(-19.8,2.6) -20.85,1.55 v2(-20.85,0) v2(-21.35,0) -21.35,-2.9 ; v2(-2.525,-2.275) -2.525,-1.225 ; v2(8.2,-2.3) v2(7.5,-2.3) -0.1,-2.3 -1.2,-1.2 -2.5,-1.2 -4.752,-1.2 -5.177,-1.625 -9.135,-1.625 v2(-10.41,-2.9) v2(-11.01,-2.9) -11.11,-2.9 v2(-17.47,-2.9) -21.35,-2.9
  Bottom Copper w0.36: C10.2 -2.525,-3.525 v2(-2.525,-2.275)
  Bottom Copper w0.5: R4.1 -20.261,5.461 -19.8,5 v2(-19.8,3.2) ; v2(-19.8,2.6) -19.8,4.4
  Bottom Copper w1: v2(7.5,-2.3) v2(8.2,-2.3) v2(8.2,2) ; v2@8.2,1.9 v2(8.2,2.6)
  other v2: -18.07,-2.9
VBUSpre: C9.1 FB1.1 P1.A4-B9 P1.A9-B4 | length 12.3
  Top Copper w0.5: P1.A9-B4@-27.573,-2.375 P1.A9-B4 ; C9.1 -25.1,3.8 -24.5,3.2 FB1.1 FB1.1@-24.5,2.725
  Top Copper w0.6: P1.A9-B4 v2(-26.3,-2.425) ; P1.A4-B9 v2(-26.3,2.425) -24.8,2.425 FB1.1@-24.5,2.725
  Bottom Copper w0.5: v2(-26.3,-2.425) v2(-26.3,2.425)
VIO: C11.2 P3.4 P4.7 P5.11 P6.4 P7.1 R2.1 R3.1 SW1.1 SW1.2 SW1.3 SW1.4 U1.4 | length 113.2
  Top Copper w0.36: U1.4 1.075,2.405 4.38,-0.9 v2(5.6,-0.9) ; 3.15,7.25 P4.7@3.15,8.6
  Top Copper w0.5: v2(-22.7,-9.5) -22.585,-9.385 -22.585,-6.815 P7.1 ; SW1.3 SW1.3@13.3,-4.185 ; P5.11@13.3,-8.88 P5.11
  Top Copper w1: P4.7@3.15,8.6 3.169,8.6 3.341,8.428 3.341,6.859 5.6,4.6 v2(5.6,3) v2(5.6,2.3) ; v2(5.6,-4.1) v2(6.6,-4.1) 8.11,-4.1 8.185,-4.175 SW1.1 SW1.2 SW1.3 SW1.4 17.825,-4.175 18.225,-4.175 v2(18.6,-3.8) ; P5.11@13.3,-8.88 SW1.3@13.3,-4.185 ; v2@18.6,-3.81 v2@19.4,-3.81 ; P3.4@25.1,1.27 P3.4@32.85,1.27
  Signal Layer 2 w1: P7.1 -20.57,-4.8 -10.4,-4.8 -9.964,-5.236 -9.136,-5.236 -7.6,-3.7 5.1,-3.7 5.5,-4.1 v2(5.6,-4.1) v2@6.5,-4.1
  Bottom Copper w0.5: R2.1 R3.1 -32.9,-10.1 -23.3,-10.1 v2(-22.7,-9.5)
  Bottom Copper w1: v2(5.6,3) v2(5.6,2.3) v2(5.6,-0.9) v2(5.6,-4.1) v2(6.6,-4.1) ; v2@18.6,-3.81 19.4,-3.81 21.94,-1.27 25.1,-1.27 P6.4@32.85,-1.27
  other v2: 19.4,-3.8 28.6,0.01 29.2,0 29.8,0
pads on no net: P1.A5 P1.A8 P1.B5 P1.B8 P1.MECH U1.8 U1.24 U1.27 U1.28

## Polygon pours and split planes (outlines as drawn)
GND on Signal Layer 2 "GND_L03_P002" (solid, pour order 2): -34.45,10.5 34.55,10.5 34.55,-10.5 -34.45,-10.5
GND on Top Copper "GND_L01_P001" (solid, pour order 1): -34.4,10.4 34.4,10.4 34.4,-10.4 -34.4,-10.4
GND on Bottom Copper "GND_L04_P000" (solid, remove dead copper, pour order 0): -34.4,10.4 34.4,10.4 34.4,-10.4 -32.5,-10.4 -34.4,-8.5
GND on Signal Layer 1 (split plane): 34.49,-10.49 -34.49,-10.49 -34.49,10.49 34.49,10.49

## Other copper
Top Copper:
  region net GND: -22.745,0.622 -22.745,0.259 -22.345,-0.142 -22.508,0.021 -22.508,0.452 -22.678,0.622
  pour cut-out: -0.655,2.974 -0.655,2.828 0.261,1.911 0.425,2.075 0.425,3.7 -0.298,3.7 -0.666,3.332
  pour cut-out: -5.425,3.7 -5.425,2.184 -5.297,2.056 -3.711,2.056 -3.711,2.066 -5.088,3.442 -5.088,3.7
  pour cut-out: 2.866,2.778 3.157,2.778 3.366,2.987 3.366,4.416 3.172,4.61 2.866,4.61
  pour cut-out: -5.245,-2.784 -5.554,-2.784 -5.745,-2.975 -5.745,-4.4 -5.529,-4.616 -5.245,-4.616
  pour cut-out: 2.825,-4.616 3.134,-4.616 3.325,-4.425 3.325,-3 3.109,-2.784 2.825,-2.784
  pour cut-out: -3.475,3.73 -1.525,3.73 -1.525,3.955 -1.125,4.355 -1.216,4.446 -1.216,4.57 -3.422,4.57 -3.475,4.518
  pour cut-out: -2.155,3.255 -2.155,2.83 -1.725,2.4 -1.275,2.4 -1.275,2.491 -1.044,2.721 -1.125,2.802 -1.125,3.075 -1.975,3.075
  pour cut-out: -28.438,4.32 -27.897,3.779 -26.547,3.779 -27.418,4.65 -28.107,4.65
  pour cut-out: -27.65,-3.675 -27.625,-3.65 -26.673,-3.65 -26.544,-3.779 -27.389,-4.625 -27.65,-4.625
  pour cut-out: -22.529,0.195 -21.734,-0.6 -21.55,-0.6 -21.55,-0.004 -21.749,0.195
  region net GND: -23.4,0.296 -22.629,0.296 -21.809,-0.525 -21.809,-0.8 -22.694,-0.8 -22.694,-0.456 -22.85,-0.3 -23.227,-0.3 -23.4,-0.127
  pour cut-out: 3.6,1.9 3.9,2.2 3.9,2.5 5.3,1.1 18.2,1.1 19.075,0.225 15.275,0.225 15,0.5 5,0.5
  pour cut-out: -1.93,8.89 -1.3,8.26 -1.3,7.4 0.425,5.675 0.875,5.675 2.3,4.25 3.05,4.25 3.05,5.45 1.8,6.7 1.8,7.7 0.61,8.89
  pour cut-out: 17.8,-1.5 18.5,-0.8 19.421,-0.8 20.3,0.079 20.3,0.25 15.35,0.25 15.3,0.2 15,0.5 5,0.5 3.031,2.469 2.831,2.469 2.55,2.75 2.375,2.575 1.725,2.575 1.725,2.175 1.55,2 4.38,-0.83 4.38,-0.9 4.45,-0.9 5.05,-1.5
  pour cut-out: -4.45,2.75 -2.23,0.53 -2.175,0.53 -2.175,-0.333 0.133,-0.333 -2.7,2.5 -2.7,3.5 -3.7,3.5
  pour cut-out: -6.95,0.75 -6.95,0.65 -6.075,-0.225 -6.075,0.925 -5.425,1.575 -5.425,3.7 -4.75,3.7 -4.125,4.325 -4.125,4.625 -4.727,5.227 -7.1,5.227 -7.1,0.9
  region net 1V8: -9.875,4.325 -9.45,4.75 -7.7,4.75 -6.45,3.5 -6.45,1.25 -6.95,0.75 -9.2,0.75 -9.875,1.425
  region net 2V5: -13.1,2.4 -12.6,2.9 -12.6,5.15 -13.1,5.65 -14.55,5.65 -14.95,5.25 -14.95,2.75 -14.6,2.4
  region net 3V3: -22.45,4.5 -21.95,4 -19.7,4 -19.2,4.5 -19.2,5.25 -19.7,5.75 -21.95,5.75 -22.45,5.25
  pour cut-out: 2.293,-1.383 0.8,-1.383 0.8,-0.89 -2.145,2.055 -1.8,2.4 -1.275,2.4 2.268,-1.143 2.293,-1.143
  pour cut-out: -23.4,-0.95 -22.844,-0.95 -22.685,-0.791 -22.685,-0.445 -23.4,-0.445
  pour cut-out: -23.4,0.95 -22.895,0.95 -22.745,0.8 -22.745,0.445 -23.4,0.445
  pour cut-out: -21.809,-0.797 -21.809,0.746 -21.605,0.95 -20.8,0.95 -20.374,0.524 -20.374,-0.524 -20.804,-0.95 -21.656,-0.95
  region net VIO: 30.1,0.9 30.1,-0.2 29.9,-0.4 28.5,-0.4 28.3,-0.2 28.3,0.9
  region net VIO: 18,-4.5 18.4,-4.9 19.6,-4.9 19.7,-4.8 19.9,-4.6 19.9,-3.8 19.6,-3.5 18.4,-3.5 18,-3.9
Signal Layer 2:
  pour cut-out: -8.1,3.1 -1.1,3.1 -0.7,2.7 -0.7,2 -1.2,1.5 -7.931,1.5 -8.165,1.266 -8.288,1.388 -9.2,1.388 -9.2,2.5
  pour cut-out: 7.05,0 7.714,0.664 8.864,0.664 13.31,5.11 13.31,9.445 15.85,9.445 15.85,5.05 9.8,-1 9.6,-0.8 7.6,-0.8
Bottom Copper:
  pour cut-out: -26.5,-6.308 -26.9,-6.308 -26.9,-6.6 -26.5,-6.6
  pour cut-out: -27.9,-8.109 -27.9,-8 -27.25,-7.35 -26.05,-7.35 -25.1,-8.3 -25.1,-8.9 -27.109,-8.9
  pour cut-out: 15.395,-5 16.805,-5 17.035,-4.77 17.035,-1.56 16.825,-1.35 14.9,-1.35 14.9,-1.8 15.175,-2.075 15.165,-2.085 15.164,-4.77
  pour cut-out: -7.01,8.89 -6.45,9.45 -6.45,9.5 -5.04,9.5 -2.84,7.3 -2.8,7.3 -2.8,7.15 -3.2,6.75 -3.85,7.4 -5.5,7.4
  region net 1V8: -12.2,5 -11.2,6 -8.95,6 -7.175,4.225 -6.425,4.225 -5.95,3.75 -5.95,0.75 -6.7,0 -6.7,-1.5 -6.95,-1.75 -7.7,-1.75 -7.95,-2 -8.7,-2 -8.7,-1 -9.45,-0.25 -9.45,1 -9.95,1.5 -11.45,1.5 -12.2,2.25
  region net 2V5: -19.2,5 -18.2,6 -13.45,6 -12.45,5 -12.45,2.25 -13.45,1.25 -18.2,1.25 -19.2,2.25
  region net 3V3: -22.45,5 -22.95,4.5 -24.95,4.5 -25.7,3.75 -25.7,1.75 -24.45,0.5 -21.45,0.5 -20.45,1.5 -20.45,4.75 -20.7,5
  region net 2V5: -13.8,2.85 -13,2.85 -12.9,2.95 -12.9,4.05 -13,4.15 -13.8,4.15
  region net TYPEC_SHIELD: -33.314,2.159 -34.114,2.159 -34.214,2.059 -34.214,0.959 -34.114,0.859 -33.314,0.859
  region net GND: -33.314,-0.841 -34.114,-0.841 -34.214,-0.941 -34.214,-2.041 -34.114,-2.141 -33.314,-2.141
  region net 1V8: -7.9,3.3 -7.9,1.3 -7.8,1.2 -6.7,1.2 -6.6,1.3 -6.6,3.3
  region net 3V3: -20.7,4 -20.7,4.8 -20.8,4.9 -21.9,4.9 -22,4.8 -22,4
  region net VIO: 28.3,-0.9 28.3,0.2 28.5,0.4 29.9,0.4 30.1,0.2 30.1,-0.9

## Silkscreen, mask and mechanical layers (free items; w line width, h text height)
Top Overlay:
  region: -14.35,-0.885 -13.85,-1.385 -13.85,-0.635 -14.35,-0.135
  region: -14.45,-0.885 -14.95,-1.385 -14.95,-0.635 -14.45,-0.135
  region: -14.35,0.865 -13.85,1.365 -13.85,0.615 -14.35,0.115
  region: -14.45,0.865 -14.95,1.365 -14.95,0.615 -14.45,0.115
  region: -15.275,0.04 -15.775,0.54 -15.025,0.54 -14.525,0.04
  region: -15.275,-0.06 -15.775,-0.56 -15.025,-0.56 -14.525,-0.06
  region: -13.525,0.04 -13.025,0.54 -13.775,0.54 -14.275,0.04
  region: -13.525,-0.06 -13.025,-0.56 -13.775,-0.56 -14.275,-0.06
  text "POWER" at -34.28,9.262 h2
  text "UART-C / revA01" at -25.079,6.728 h3
  text "5" at 7.951,6.087 h1.6
  text "G" at -12.434,6.081 h1.6
  text "CTS" at -10.529,6.081 h1.6
  text "RTS" at -7.984,6.081 h1.6
  text "DTR" at -5.578,6.082 h1.6
  text "RX" at -2.656,6.082 h1.6
  text "TX" at -0.109,6.082 h1.6
  text "VIO" at 2.108,6.08 h1.6
  text "G" at 5.346,6.081 h1.6
  text "3.3" at 10.007,6.083 h1.6
  text "2.5" at 12.511,6.083 h1.6
  text "1.8" at 15.117,6.083 h1.6
  text "CTS" at 20.342,5.826 h2
  text "RTS" at 20.348,3.286 h2
  text "VIO" at 20.263,0.746 h2
  text "TX" at 20.666,-1.793 h2
  text "RX" at 20.658,-4.333 h2
  text "GND" at -17.124,-5.217 h2 r270
  text "GND" at 19.982,-6.874 h2
  text "G" at -12.434,-6.919 h1.6
  text "CB4" at -10.609,-6.919 h1.6
  text "CB3" at -8.056,-6.919 h1.6
  text "CB2" at -5.519,-6.919 h1.6
  text "CB1" at -2.906,-6.919 h1.6
  text "CB0" at -0.437,-6.92 h1.6
  text "G" at 2.806,-6.919 h1.6
  text "RI" at 5.146,-6.918 h1.6
  text "DCD" at 7.076,-6.919 h1.6
  text "DSR" at 9.679,-6.919 h1.6
  text "VIO" at 12.268,-6.92 h1.6
  text "G" at 15.506,-6.919 h1.6
  text "TX" at -33.599,-7.523 h2
  text "VIO" at -25.376,-8.002 h2 r90
  text "+" at -22.97,-9.29 h1.2
  text "-" at -20.43,-9.29 h1.2
  text "RX" at -33.607,-9.723 h2
Bottom Overlay:
  text "< ESP32" at 26.268,8.976 h2
  text "5" at 8.509,6.087 h1.6
  text "G" at -11.746,6.081 h1.6
  text "RI" at -9.006,6.082 h1.6
  text "RTS" at -6.036,6.081 h1.6
  text "DTR" at -3.362,6.082 h1.6
  text "RX" at -1.204,6.082 h1.6
  text "TX" at 1.329,6.082 h1.6
  text "VIO" at 4.192,6.08 h1.6
  text "G" at 6.034,6.081 h1.6
  text "3.3" at 11.593,6.083 h1.6
  text "2.5" at 14.089,6.083 h1.6
  text "1.8" at 16.683,6.083 h1.6
  text "GND" at 23.148,5.826 h2
  text "3.3" at -24.828,4.318 h1.6 r90
  text "2.5" at -17.768,4.314 h1.6 r90
  text "1.8" at -10.708,4.308 h1.6 r90
  text "github.com/streamx3/uartc" at 16.595,3.544 h2
  text "RX" at 22.472,3.287 h2
  text "TX" at 22.464,0.747 h2
  text "ft-3v3" at 0.44,0.657 h1.6
  text "VIO" at 22.867,-1.794 h2
  text "EN" at 22.439,-4.333 h2
  text "IO0" at 22.801,-6.874 h2
  text "G" at -11.746,-6.919 h1.6
  text "CB4" at -8.491,-6.919 h1.6
  text "CB3" at -5.964,-6.919 h1.6
  text "CB2" at -3.421,-6.919 h1.6
  text "CB1" at -0.954,-6.919 h1.6
  text "CB0" at 1.657,-6.92 h1.6
  text "G" at 3.494,-6.919 h1.6
  text "CTS" at 6.669,-6.919 h1.6
  text "DCD" at 9.384,-6.919 h1.6
  text "DSR" at 11.861,-6.919 h1.6
  text "VIO" at 14.352,-6.92 h1.6
  text "G" at 16.194,-6.919 h1.6
  text "CB0" at -28.192,-7.624 h2
  text "VIO" at -21.898,-9.024 h2
  text "GND" at -17.817,-9.024 h2
  text "CB1" at -28.281,-9.424 h2
Board Outline:
  lines w0.1: -35,-11 35,-11 35,0 35,11 -35,11 -35,0 -35,-11

## Dimensions
35,-11 to 35,11 on Dimensions
-35,11 to 35,11 on Dimensions